# Allegro board ISL6236A_PCB_V1I1.brd
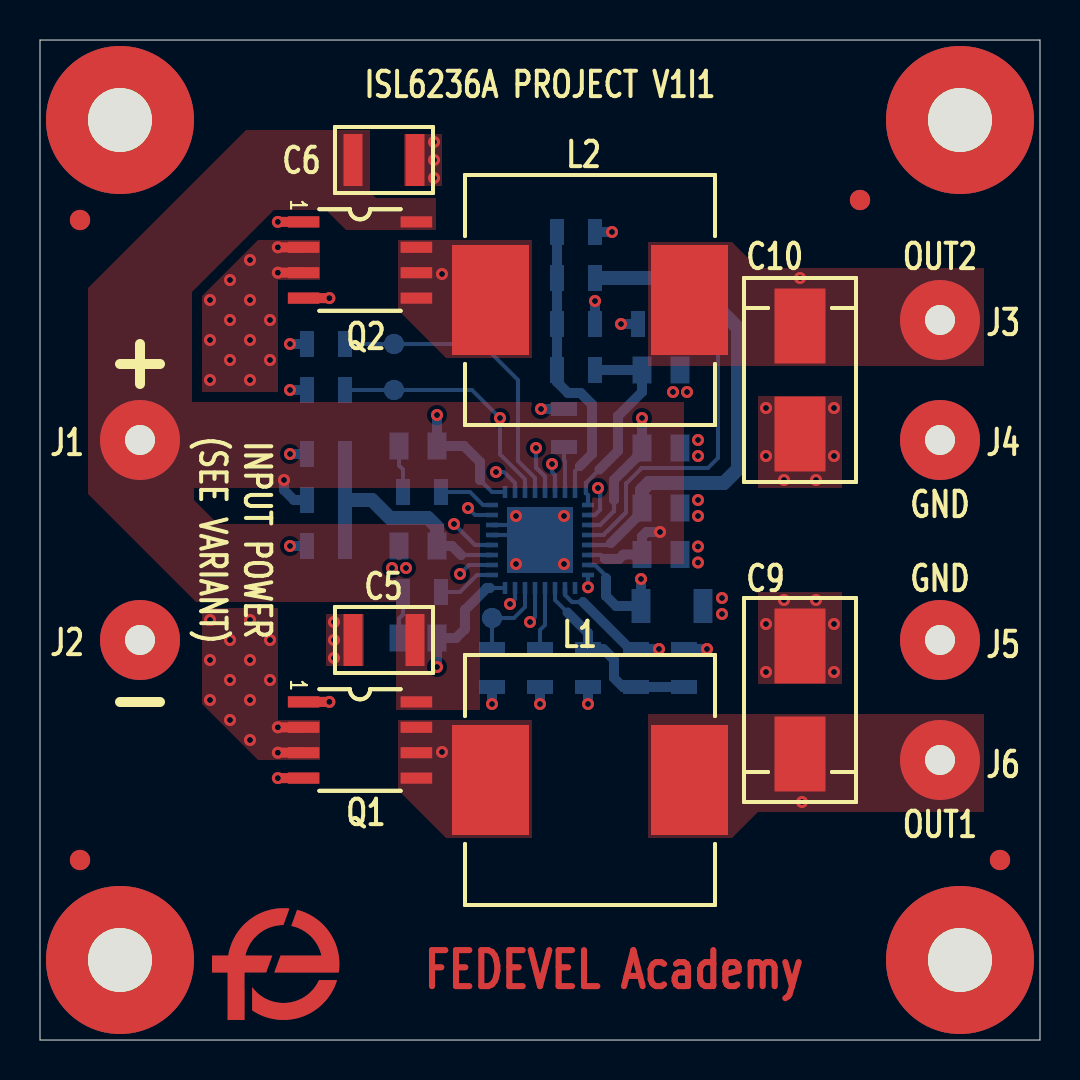
[diagram p0: board, top side]
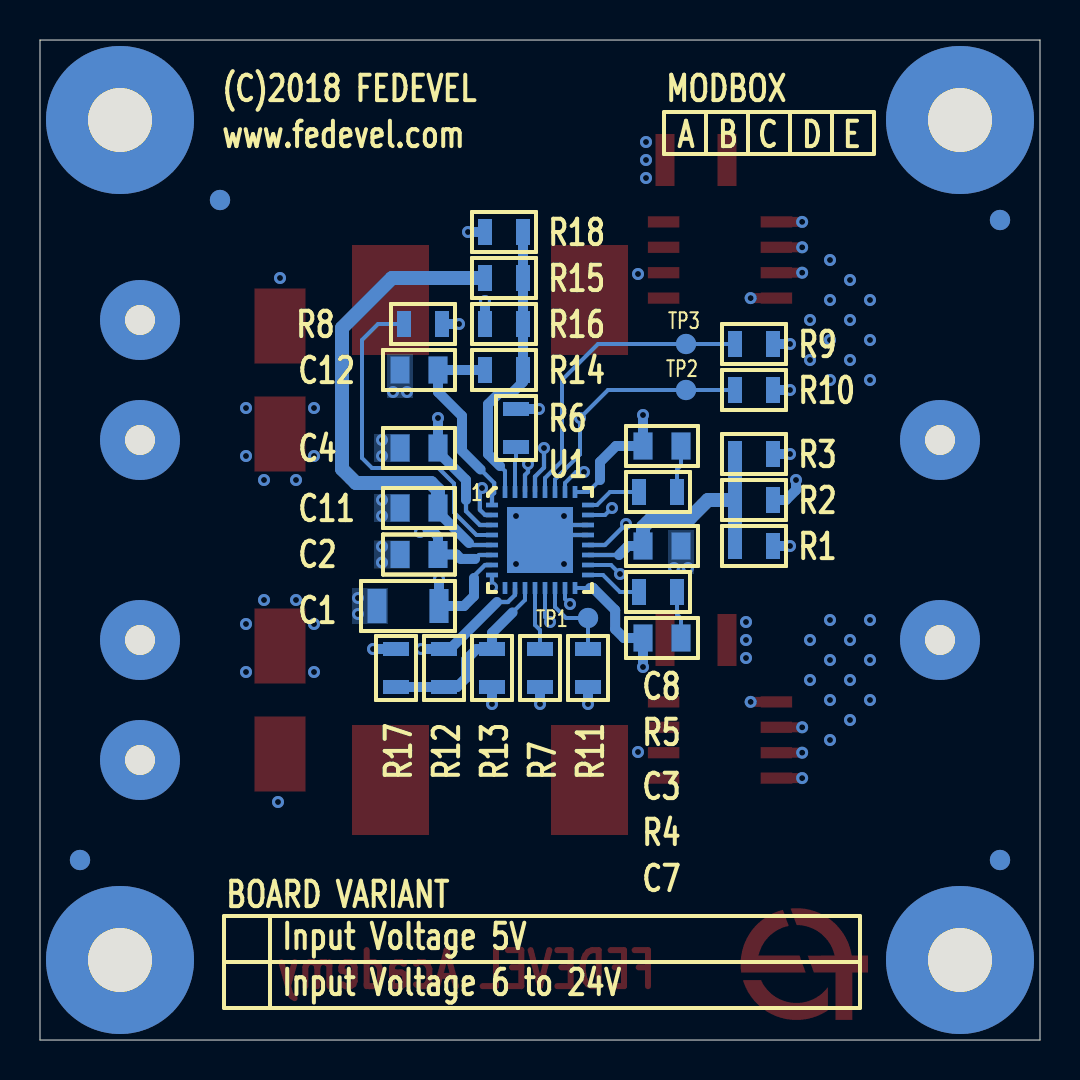
[diagram p1: board, bottom side, seen from below]

Outline 50 x 50 mm; copper layers: TOP, L2, L3, L4, L5, BOTTOM. Coordinates in mm from the lower left corner of the outline.
Outline path: 0,50 50,50 50,0 0,0 0,50

## Design rules (mm)
constraint set DEFAULT: 
net group POWER_CLASS: nets +5V_LDO +5V_PVCC +REF +VREF3

## Placement (name value [footprint] x y rotation side)
C1  4u7, 35V  [C1206]  31.6 21.7 180 bottom
C2  1uF, 50V  [C0805]  31.05 24.27 180 bottom
C3  1uF, 50V  [C0805]  18.9 24.7 180 bottom
C4  1uF, 50V  [C0805]  31.05 29.6 0 bottom
C5  10uF, 50V  [C1210]  17.2 20 0 top
C6  10uF, 50V  [C1210]  17.2 44 180 top
C7  100nF  [C0805]  18.9 20.1 180 bottom
C8  220nF  [C0805]  18.9 29.7 0 bottom
C9  330uF, 10V  [7343-43]  38 17 90 top
C10  330uF, 10V  [7343-43]  38 33 270 top
C11  10nF  [C0805]  31.05 26.6 0 bottom
C12  100nF  [C0805]  31.05 33.5 0 bottom
FID1  Fiducial M80MILxD40MIL  [FID_M80MIL_D40MIL]  2 9 0 top
FID2  Fiducial M80MILxD40MIL  [FID_M80MIL_D40MIL]  48 9 0 top
FID3  Fiducial M80MILxD40MIL  [FID_M80MIL_D40MIL]  41 42 0 top
FID4  Fiducial M80MILxD40MIL  [FID_M80MIL_D40MIL]  2 41 0 top
FID5  Fiducial M80MILxD40MIL  [FID_M80MIL_D40MIL]  2 9 180 bottom
FID6  Fiducial M80MILxD40MIL  [FID_M80MIL_D40MIL]  48 9 180 bottom
FID7  Fiducial M80MILxD40MIL  [FID_M80MIL_D40MIL]  41 42 180 bottom
FID8  Fiducial M80MILxD40MIL  [FID_M80MIL_D40MIL]  2 41 180 bottom
J1  4mm x 1.5mm  [PAD_4MMX1MM5]  5 30 0 top
J2  4mm x 1.5mm  [PAD_4MMX1MM5]  5 20 0 top
J3  4mm x 1.5mm  [PAD_4MMX1MM5]  45 36 0 top
J4  4mm x 1.5mm  [PAD_4MMX1MM5]  45 30 0 top
J5  4mm x 1.5mm  [PAD_4MMX1MM5]  45 20 0 top
J6  4mm x 1.5mm  [PAD_4MMX1MM5]  45 14 0 top
L1  3u3, DR125-3R3-R  [DR125]  27.5 13 180 top
L2  2u2, DR125-2R2-R  [DR125]  27.5 37 0 top
MH1  7.4mm, 3.2mm  [MH_D7MM4_H3MM2]  4 4 0 top
MH2  7.4mm, 3.2mm  [MH_D7MM4_H3MM2]  46 4 0 top
MH3  7.4mm, 3.2mm  [MH_D7MM4_H3MM2]  46 46 0 top
MH4  7.4mm, 3.2mm  [MH_D7MM4_H3MM2]  4 46 0 top
NOREF  -  []  5 0 90 top
NOREF#2  -  []  3.35 47.46 0 top
NOREF#3  -  []  45 0 90 top
NOREF#4  -  []  44.81 36.73 0 top
NOREF#5  -  []  0 35 0 top
NOREF#6  -  []  45 0 90 top
NOREF#7  -  []  8.6 1 0 top
NOREF#8  -  []  5 0 90 top
NOREF#9  -  []  0 30 0 top
NOREF#10  -  []  45 0 90 top
NOREF#11  -  []  0 0 0 top
NOREF#12  -  []  0 5 0 top
NOREF#13  -  []  0 0 90 top
NOREF#14  -  []  45 0 90 top
NOREF#15  -  []  0 5 0 top
Q1  SI4816BDY-T1-GE3  [SO-8]  16 15 0 top
Q2  SI4816BDY-T1-GE3  [SO-8]  16 39 0 top
R1  0R  [R0805]  14.3 24.7 180 bottom
R2  0R  [R0805]  14.3 27 0 bottom
R3  10R, 1%  [R0805]  14.3 29.3 180 bottom
R4  1R, 1%  [R0805]  19.1 22.4 0 bottom
R5  1R, 1%  [R0805]  19.1 27.4 180 bottom
R6  200k, 1%  [R0805]  26.2 30.6 90 bottom
R7  200k, 1%  [R0805]  25 18.6 90 bottom
R8  10k, 1%  [R0805]  30.85 35.8 180 bottom
R9  200k, 1%  [R0805]  14.3 34.8 180 bottom
R10  200k, 1%  [R0805]  14.3 32.5 180 bottom
R11  10k, 1%  [R0805]  22.6 18.6 270 bottom
R12  TBD  [R0805]  29.8 18.6 90 bottom
R13  0R  [R0805]  27.4 18.6 270 bottom
R14  TBD  [R0805]  26.8 33.5 0 bottom
R15  0R  [R0805]  26.8 38.1 0 bottom
R16  TBD  [R0805]  26.8 35.8 0 bottom
R17  TBD  [R0805]  32.2 18.6 270 bottom
R18  TBD  [R0805]  26.8 40.4 180 bottom
TP1  Testpoint 40mil  [TP_40MIL]  22.6 21.1 180 bottom
TP2  Testpoint 40mil  [TP_40MIL]  17.7 32.5 180 bottom
TP3  Testpoint 40mil  [TP_40MIL]  17.7 34.8 180 bottom
U1  ISL6236AIRZ  [L32_5X5B]  25 25 180 bottom

## Library data of the parts
C1 = CAP CER 4.7UF 35V X5R 1206
C2-C4 = CAP CER 1UF 50V X7R 0805
C5 C6 = CAP CER 10UF 50V X5R 1210
C7 C12 = CAP CER 0.1UF 50V X7R 0805
C8 = CAP CER 0.22UF 50V X7R 0805
C9 C10 = CAP TANT POLY 330UF 10V 2917
C11 = CAP CER 10000PF 50V X7R 0805
FID1-FID8 = Fiducial M80MILxD40MIL
J1-J6 = Pad D4MMxH1MM5
L1 = FIXED IND 3.3UH 9.26A 6.3 MOHM
L2 = FIXED IND 2.2UH 10.9A 4.5 MOHM
MH1-MH4 = Mounting hole D7MM4xH3MM2
Q1 Q2 = SI4816BDY-T1-GE3
R1 R2 R13 R15 = RES SMD 0 OHM JUMPER 1/8W 0805
R3 = RES SMD 10 OHM 1% 1/8W 0805
R4 R5 = RES SMD 1 OHM 1% 1/8W 0805
R6 R7 R9 R10 = RES SMD 200K OHM 1% 1/8W 0805
R8 R11 = RES SMD 10K OHM 1% 1/8W 0805
R12 R14 R16-R18 = RES SMD TBD 0805
TP1-TP3 = Testpoint D40MIL
U1 = ISL6236AIRZ

## Footprints (pads in the part's own frame, mm; a bottom-side part is the same pattern mirrored in y, then rotated)
7343-43
  rect 3.75x2.55 smd: 1(-2.7,0) 2(2.7,0)
C0805
  rect 0.95x1.35 smd: 1(-0.95,0) 2(0.95,0)
C1206
  rect 0.95x1.7 smd: 1(-1.55,0) 2(1.55,0)
C1210
  rect 0.95x2.6 smd: 1(-1.55,0) 2(1.55,0)
DR125
  rect 3.85x5.5 smd: 1(-4.975,0) 2(4.975,0)
FID_M80MIL_D40MIL
  round 1.016 smd: (0,0)
L32_5X5B
  rect 0.6x0.23 smd: 1(-2.4,1.75) 2(-2.4,1.25) 3(-2.4,0.75) 4(-2.4,0.25) 5(-2.4,-0.25) 6(-2.4,-0.75) 7(-2.4,-1.25) 8(-2.4,-1.75) 17(2.4,-1.75) 18(2.4,-1.25) 19(2.4,-0.75) 20(2.4,-0.25) 21(2.4,0.25) 22(2.4,0.75) 23(2.4,1.25) 24(2.4,1.75)
  rect 0.23x0.6 smd: 9(-1.75,-2.4) 10(-1.25,-2.4) 11(-0.75,-2.4) 12(-0.25,-2.4) 13(0.25,-2.4) 14(0.75,-2.4) 15(1.25,-2.4) 16(1.75,-2.4) 25(1.75,2.4) 26(1.25,2.4) 27(0.75,2.4) 28(0.25,2.4) 29(-0.25,2.4) 30(-0.75,2.4) 31(-1.25,2.4) 32(-1.75,2.4)
  rect 3.3x3.3 smd: 33(0,0)
MH_D7MM4_H3MM2
  round 7.4 hole 3.2: 1(0,0)
PAD_4MMX1MM5
  round 4 hole 1.5: 1(0,0)
R0805
  rect 0.7x1.3 smd: 1(-0.95,0) 2(0.95,0)
SO-8
  rect 1.575x0.559 smd: 1(-2.819,1.905) 2(-2.819,0.635) 3(-2.819,-0.635) 4(-2.819,-1.905) 5(2.819,-1.905) 6(2.819,-0.635) 7(2.819,0.635) 8(2.819,1.905)
TP_40MIL
  round 1.016 smd: 1(0,0)

## Nets
+1V5: C9.1 J6.1 L1.1 R12.2 U1.10
+1V05: C10.1 J3.1 L2.2 U1.30
+5V_LDO: C1.2 R1.2 U1.7
+5V_PVCC: C3.1 R1.1 R2.2 R3.1 U1.19
+5V_VCC: C4.1 R3.2 R8.2 R9.2 R10.2 R11.2 R13.2 R16.2 U1.2 U1.3 U1.20
+VIN: C2.2 C5.2 C6.2 J1.1 Q1.8 Q2.8 R2.1 U1.6
GND: C1.1 C2.1 C3.2 C4.2 C5.1 C6.1 C9.2 C10.2 C11.2 C12.2 J2.1 J4.1 J5.1 MH1.1 MH2.1 MH3.1 MH4.1 Q1.2 Q1.3 Q2.2 Q2.3 R6.2 R7.1 R17.1 R18.1 U1.8 U1.21 U1.22 U1.29 U1.33
+REF: C12.1 R14.2 U1.1
+VREF3: C11.1 R15.2 U1.5(VREF3)
EN1: R11.1 TP1.1 U1.14
EN_LDO: R8.1 U1.4
FB1: R12.1 R13.1 R17.2 U1.11
LGATE1: Q1.4(G2) U1.18
LGATE2: Q2.4(G2) U1.23
PHASE1: C7.1 L1.2 Q1.5 Q1.6 Q1.7 U1.16
PHASE2: C8.2 L2.1 Q2.5 Q2.6 Q2.7 U1.25
POK1: R10.1 TP2.1 U1.13 U1.27
POK2: R9.1 TP3.1 U1.28
REFIN2: R14.1 R15.1 R16.1 R18.2 U1.32
UGATE1: Q1.1 U1.15
UGATE2: Q2.1 U1.26
N16779316: R4.2 U1.17
N16779319: C7.2 R4.1
N16779334: R5.1 U1.24
N16779337: C8.1 R5.2
N16781981: R7.2 U1.12
N16782035: R6.1 U1.31

Pads without a net: U1 9

## Via types
v1: diameter 0.6, hole 0.3, TOP to BOTTOM, 100 vias

## Routing (per net, layer and track width the routed paths; a pad name or vN(x,y) marks a point on that pad's centre or on a via; arc(x,y) is an arc through that point)
+1V05: length 17.7
  L3 w1: v1(38,38.1) 33.4,33.5 30.3,33.5 v1(25.6,28.8)
  BOTTOM w0.21: v1(25.6,28.8) 25.6,28.4 25.75,28.25 U1.30
+1V5: length 16.8
  L3 w1: v1(38.1,11.9) 38.1,12.4 v1(30.95,19.55)
  BOTTOM w0.21: 27.15,21.9 26.6,21.9 26.25,22.25 U1.10
  BOTTOM w0.5: v1(30.95,19.55) R12.2 29.5,19.55 27.15,21.9
+5V_LDO: length 24.8
  L3 w1: v1(30.05,23.05) 28.1,25 21.31,25 21.01,24.7 v1(12.5,24.7)
  BOTTOM w0.21: U1.7 27.75,23.75 28.3,23.2 28.3,23.1
  BOTTOM w0.5: R1.2 v1(12.5,24.7) ; 28.3,23.1 28.3,22.2 28.8,21.7 C1.2 v1(30.05,23.05)
+5V_PVCC: length 13.6
  BOTTOM w0.21: U1.19 21.05,24.25
  BOTTOM w0.5: 21.05,24.25 20.6,24.7 C3.1
  BOTTOM w0.7: R2.2 R3.1 ; R2.2 R1.1 ; R2.2 16.6,27 17.5,26.1 19.4,26.1 19.85,25.65 C3.1
+5V_VCC: length 17.3
  BOTTOM w0.21: U1.2 27.75,26.25 28,26.51 28,27.5 v1(27.9,27.6) ; v1(20.7,25.8) 21.75,24.75 U1.20 ; 28.7,27 28.7,26.45 28,25.75 U1.3
  BOTTOM w0.5: R13.2 v1(27.4,16.8) ; R16.2 v1(27.75,36.95) ; R3.2 v1(12.5,29.3) ; R11.2 v1(22.6,16.8) ; R9.2 v1(12.5,34.8) ; R10.2 v1(12.5,32.5) ; v1(30.1,31.1) C4.1 30.1,29.4 28.7,28 28.7,27 ; R8.2 v1(29.05,35.8)
+VIN: length 6.6
  BOTTOM w0.21: U1.6 28.05,24.25 28.25,24.05
  BOTTOM w0.5: 28.25,24.05 28.95,24.05 29.18,24.27 C2.2 30.1,25.18 30.32,25.4 v1(31,25.4) ; R2.1 12.7,27 12.2,27.5 v1(12.2,28)
GND: length 77.3
  TOP w0.5: Q1.3 v1(11.89,14.37) ; Q2.3 v1(11.89,38.37) ; Q1.2 v1(11.89,15.63) ; Q2.2 v1(11.89,39.63)
  L2 w1.5: J4.1 45,32.55 ; J4.1 42.45,30 ; J4.1 47.55,30 ; J4.1 45,27.45 ; 5,17.45 J2.1 ; J2.1 2.45,20 ; J2.1 7.55,20 ; J2.1 5,22.55 ; 42.45,20 J5.1 ; J5.1 45,17.45 ; J5.1 47.55,20 ; J5.1 45,22.55
  L5 w1.5: 45,27.45 J4.1 ; J4.1 45,32.55 ; J4.1 47.55,30 ; J4.1 42.45,30 ; J5.1 47.55,20 ; J5.1 45,22.55 ; J5.1 42.45,20 ; J5.1 45,17.45 ; 5,17.45 J2.1 ; J2.1 7.55,20 ; J2.1 5,22.55 ; J2.1 2.45,20
  BOTTOM w0.21: v1(23.8,26.2) 23.8,26.1 23.45,25.75 U1.22 ; U1.21 24.75,25.25 U1.33 ; v1(24.8,29.6) 24.8,28.62 25.25,28.17 U1.29 ; U1.8 v1(27.4,22.64)
  BOTTOM w0.5: R7.1 v1(25,16.8) ; R6.2 v1(25.05,31.55) ; R17.1 v1(33.35,19.55) ; R18.1 v1(28.6,40.4)
  vias: v1(8.5,37) v1(8.5,35) v1(8.5,33) v1(8.5,21) v1(8.5,19) v1(8.5,17) v1(9.5,38) v1(9.5,36) v1(9.5,34) v1(9.5,20) v1(9.5,18) v1(9.5,16) v1(10.5,39) v1(10.5,37) v1(10.5,35) v1(10.5,33) v1(10.5,21) v1(10.5,19) v1(10.5,17) v1(10.5,15) v1(11.5,36) v1(11.5,34) v1(11.5,20) v1(11.5,18) v1(14.7,20.9) v1(14.7,20) v1(14.7,19.1) v1(17.6,23.6) v1(18.3,23.6) v1(19.7,44.9) v1(19.7,44) v1(19.7,43.1) v1(23.8,23.8) v1(26.2,26.2) v1(26.2,23.8) v1(31.65,32.4) v1(32.35,32.4) v1(32.9,30) v1(32.9,29.2) v1(32.9,27) v1(32.9,26.2) v1(32.9,24.68) v1(32.9,23.88) v1(34.1,22.1) v1(34.1,21.3) v1(36.3,31.6) v1(36.3,29.2) v1(36.3,20.8) v1(36.3,18.4) v1(37.2,28) v1(37.2,22) v1(38.8,28) v1(38.8,22) v1(39.7,31.6) v1(39.7,29.2) v1(39.7,20.8) v1(39.7,18.4)
+REF: length 10.3
  BOTTOM w0.21: U1.1 27.4,27.24 27.3,27.35 27.3,27.85 27.97,28.53
  BOTTOM w0.5: 27.97,28.53 28.9,29.46 28.9,31.2 30.1,32.4 C12.1 R14.2
+VREF3: length 25
  BOTTOM w0.21: 28.55,24.85 28.45,24.75 U1.5
  BOTTOM w0.5: 28.55,24.85 30.1,26.4 C11.1
  BOTTOM w0.7: R15.2 32.4,38.1 34.9,35.6 34.9,28.55 34.2,27.85 30.45,27.85 30.1,27.5 C11.1
EN1: length 4.4
  BOTTOM w0.2: R11.1 TP1.1 23.7,21.1 24.25,21.65 U1.14
EN_LDO: length 17.3
  BOTTOM w0.2: U1.4 28.17,25.25 29.3,26.38 29.3,27.82 30.08,28.6 33.4,28.6 33.9,29.1 33.9,35 33.1,35.8 R8.1
FB1: length 9.9
  BOTTOM w0.2: 26.38,21.38 25.75,22 U1.11
  BOTTOM w0.5: 26.38,21.38 27.4,20.35 R13.1 28.16,19.55 28.7,19.01 28.7,18.1 29.15,17.65 R12.1 R17.2
LGATE1: length 20.4
  TOP w0.5: Q1.4 v1(11.89,13.1)
  L3 w1: v1(21,23.3) 19.9,22.2 14.27,22.2 13.1,21.03 13.1,14.16 12.04,13.1 v1(11.89,13.1)
  BOTTOM w0.2: v1(21,23.3) 21.45,23.75 U1.18
LGATE2: length 18.5
  TOP w0.5: Q2.4 v1(14.47,37.09)
  L3 w1: v1(14.47,37.09) 14.47,29.33 16.49,27.31 20.69,27.31 v1(21.4,26.6)
  BOTTOM w0.2: U1.23 21.75,26.25 v1(21.4,26.6)
PHASE1: length 10.8
  L3 w1: v1(19.85,18.65) 19.85,15.65 20.1,15.4 v1(20.1,14.4)
  BOTTOM w0.2: U1.16 22.5,22.6
  BOTTOM w0.5: v1(19.85,18.65) C7.1 20.8,20.1 21.24,20.54 21.24,21.5 22.35,22.6 22.5,22.6
PHASE2: length 13.6
  L3 w1: v1(19.85,31.25) 19.85,37.05 20.1,37.3 v1(20.1,38.3)
  BOTTOM w0.2: U1.25 22.6,27.4 22,28
  BOTTOM w0.5: v1(19.85,31.25) C8.2 21.2,29.7 22,28.9 22,28
POK1: length 38.8
  L3 w0.2: v1(23,31.1) 24.2,29.9 24.2,27.5 24.9,26.8 31,26.8 32,25.8 32,21.8 31.1,20.9 v1(24.5,20.9)
  BOTTOM w0.2: R10.1 TP2.1 21.6,32.5 v1(23,31.1) 23,29.28 24.25,28.03 U1.27 ; v1(24.5,20.9) 24.75,21.15 U1.13
POK2: length 15.3
  BOTTOM w0.2: R9.1 TP3.1 22.1,34.8 23.9,33 23.9,28.95 24.75,28.1 U1.28
REFIN2: length 14.4
  BOTTOM w0.2: U1.32 26.75,28.45 27,28.7
  BOTTOM w0.5: R18.2 R15.1 R16.1 R14.1 25.85,32.9 26.4,32.35 27.04,32.35 27.6,31.79 27.6,29.3 27,28.7
UGATE1: length 13.3
  TOP w0.5: Q1.1 v1(14.47,16.91)
  L3 w1: v1(23.5,21.8) 21.7,20 17.56,20 v1(14.47,16.91)
  BOTTOM w0.2: U1.15 23.75,22.05 v1(23.5,21.8)
UGATE2: length 24
  TOP w0.5: Q2.1 v1(11.89,40.91)
  L3 w1: v1(22.8,28.4) 21.7,29.5 18.3,29.5 17.2,30.6 17.2,39.2 15.49,40.91 v1(11.89,40.91)
  BOTTOM w0.2: v1(22.8,28.4) 23.2,28.4 23.75,27.85 U1.26
N16779316: length 2.9
  BOTTOM w0.2: U1.17 21.85,23.25 21,22.4 R4.2
N16779319: length 2.4
  BOTTOM w0.2: C7.2 17.95,21.07 18.15,21.27 R4.1
N16779334: length 2.8
  BOTTOM w0.2: R5.1 21.5,27.4 22.15,26.75 U1.24
N16779337: length 2.4
  BOTTOM w0.2: C8.1 17.95,28.73 18.15,28.52 R5.2
N16781981: length 3.2
  BOTTOM w0.2: R7.2 25,20.5 25.25,20.75 U1.12
N16782035: length 2.3
  BOTTOM w0.2: U1.31 26.25,28.95 26.2,29 R6.1

## Copper pours and planes (outline as drawn; the poured copper is in the pictures)
+1V5 on TOP: 30.4,16.3 47.2,16.3 47.2,11.4 35.9,11.4 34.6,10.1 30.4,10.1
+1V05 on TOP: 30.4,33.7 47.2,33.7 47.2,38.6 35.9,38.6 34.6,39.9 30.4,39.9
+5V_VCC on L4: 8.5,4.1 8.5,45.9 41.5,45.9 41.5,4.1
+VIN on TOP: 19.8,40.5 19.8,42.1 16.8,42.1 16.5,42.4 16.5,45.5 10.3,45.5 2.4,37.6 2.4,27.3 7.8,21.9 17.8,21.9 17.8,16.5 22,16.5 22,25.8 8.9,25.8 7.7,27 7.7,27.6 27.6,27.6 27.6,23.8 32.2,23.8 32.2,31.9 7.6,31.9 7.6,37.4 11.7,41.5 14.3,41.5 15.3,40.5
GND on TOP: 14,40 10.9,40 8.1,37.2 8.1,32.4 11.9,32.4 11.9,38 14,38
GND on TOP: 14,14 10.9,14 8.1,16.8 8.1,21.6 11.9,21.6 11.9,16 14,16
GND on TOP: 35.9,32.2 35.9,27.6 40.1,27.6 40.1,32.2
GND on TOP: 40.1,17.8 40.1,22.4 35.9,22.4 35.9,17.8
GND on TOP: 16.2,18.7 16.2,21.3 14.3,21.3 14.3,18.7
GND on TOP: 18.2,42.7 18.2,45.3 20.1,45.3 20.1,42.7
GND on BOTTOM: 31.5,25.9 31.5,27.3 33.3,27.3 33.3,25.9
GND on BOTTOM: 31.5,23.57 31.5,24.98 33.3,24.98 33.3,23.57
GND on BOTTOM: 31.5,28.9 31.5,30.3 33.3,30.3 33.3,28.9
GND on BOTTOM: 32.65,34.3 32.65,32.1 31.35,32.1 31.35,34.3
GND on BOTTOM: 18.6,25.5 18.6,23.3 17.3,23.3 17.3,25.5
GND on BOTTOM: 32.6,20.8 32.6,22.6 34.4,22.6 34.4,20.8
GND on L2, L5: 49.8,0.2 0.2,0.2 0.2,49.8 49.8,49.8
Net_1 on TOP (solid shape): 12.39,6.35 12.17,5.75 12.08,5.75 12.01,5.74 11.94,5.73 11.87,5.72 11.75,5.7 11.62,5.67 11.5,5.63 11.38,5.58 11.27,5.52 11.16,5.46 11.05,5.39 10.95,5.31 10.64,5 10.58,4.91 10.52,4.83 10.47,4.74 10.42,4.65 10.38,4.56 10.34,4.47 10.31,4.37 10.55,4.22 11.61,4.22 11.31,3.38 10.43,3.38 10.22,3.34 10.23,1.01 10.23,1 9.38,1 9.38,3.37 8.6,3.37 8.6,4.22 9.41,4.22 9.44,4.35 9.47,4.48 9.5,4.61 9.54,4.74 9.59,4.87 9.65,4.99 9.71,5.11 9.78,5.23 9.85,5.34 10.05,5.61 10.27,5.84 10.53,6.05 10.8,6.23 11.1,6.37 11.4,6.48 11.72,6.55 12.05,6.59
Net_2 on TOP (solid shape): 14.85,2.99 14.78,2.78 14.75,2.7 14.71,2.61 14.67,2.53 14.62,2.45 14.58,2.37 14.53,2.29 14.48,2.21 14.29,1.97 14.08,1.75 13.84,1.55 13.59,1.38 13.32,1.24 13.03,1.14 12.74,1.06 12.43,1.01 12.36,1.01 12.29,1 12.22,1 12.13,1 12.06,1.01 11.99,1.01 11.93,1.01 11.86,1.02 11.76,1.03 11.65,1.05 11.55,1.07 11.44,1.1 11.34,1.13 11.24,1.16 11.14,1.2 11.05,1.24 10.83,1.34 10.77,1.38 10.61,1.49 10.61,2.65 10.68,2.56 10.96,2.28 11.07,2.19 11.19,2.12 11.31,2.06 11.43,2 11.56,1.95 11.69,1.91 11.83,1.88 11.96,1.86 12.1,1.85 12.24,1.85 12.37,1.86 12.51,1.88 12.64,1.91 12.78,1.95 12.91,1.99 13.03,2.05 13.1,2.09 13.17,2.13 13.23,2.17 13.3,2.21 13.36,2.25 13.42,2.3 13.48,2.36 13.54,2.41 13.6,2.47 13.65,2.53 13.71,2.6 13.76,2.66 13.8,2.73 13.85,2.8 13.89,2.87 13.92,2.94 13.95,3
Net_3 on TOP (solid shape): 12.95,6.48 13.09,6.44 13.22,6.39 13.35,6.33 13.48,6.27 13.61,6.19 13.73,6.12 13.85,6.03 13.96,5.94 14.01,5.9 14.06,5.86 14.12,5.81 14.17,5.76 14.22,5.71 14.26,5.65 14.31,5.6 14.35,5.55 14.47,5.39 14.58,5.21 14.68,5.03 14.77,4.84 14.84,4.65 14.89,4.45 14.93,4.25 14.96,4.04 14.96,3.97 14.97,3.89 14.97,3.81 14.97,3.73 14.97,3.65 14.96,3.57 14.95,3.5 14.94,3.37 13.94,3.37 13.33,3.37 11.71,3.37 12.02,4.22 13.05,4.22 13.58,4.22 14.07,4.22 14.06,4.28 13.98,4.51 13.88,4.73 13.75,4.94 13.59,5.13 13.42,5.29 13.22,5.44 13.01,5.55 12.78,5.65 12.59,5.7 12.57,5.71 12.58,5.75 12.61,5.82 12.71,6.11 12.86,6.51
PHASE1 on TOP: 17.9,16 24.6,16 24.6,10.1 20.3,10.1 17.9,12.5
PHASE2 on TOP: 17.9,40 24.6,40 24.6,34.1 20.3,34.1 17.9,36.5

## Text on the board
Ref Des/Silkscreen Bottom: MODBOX | Input Voltage 5V | Input Voltage 6 to 24V | BOARD VARIANT | (C)2018 FEDEVEL | www.fedevel.com | E | D | C | B | A
TOP: FEDEVEL Academy
Board Geometry/Soldermask Top: FEDEVEL Academy
Ref Des/Silkscreen Top: ISL6236A PROJECT V1I1 | OUT2 | GND | OUT1 | (SEE VARIANT) | INPUT POWER
DIMENSION: Units: mm | Scale: 1:1 | Mechanical Drawing | of ISL6236A Project V1I1
ASSEMBLY_TOP: Legend: | Purple = Fitted | Gray = Not Fitted | Assembly TOP of | ISL6236A Project V1I1
ASSEMBLY_BOTTOM: Legend: | Blue = Fitted | Gray = Not Fitted | Assembly BOTTOM of | ISL6236A Project V1I1
5V VARIANT_TOP: 5V VARIANT_TOP | Legend: | Purple = Fitted | Gray = Not Fitted | Assembly TOP of | ISL6236A Project V1I1
User.5: Legend: | Blue = Fitted | Gray = Not Fitted | 5V VARIANT_BOTTOM | Assembly BOTTOM of | ISL6236A Project V1I1
User.6: 6 TO 24V VARIANT_T | Legend: | Purple = Fitted | Gray = Not Fitted | Assembly TOP of | ISL6236A Project V1I1
User.7: Legend: | Blue = Fitted | Gray = Not Fitted | 6 TO 24V VARIANT_B | Assembly BOTTOM of | ISL6236A Project V1I1
User.8: FIGURE | FINISHED_SIZE | 0.3 | 1.5 | 3.2 | DRILL CHART: TOP to BOTTOM | ALL UNITS ARE IN MILLIMETERS | PLATED | QTY | 100 | 6 | 4
User.9: Files: | 01-TOP_OVERLAY.art - Top Overlay | 02-TOP_PASTE.art - Top Paste | 03-TOP_SOLDER.art - Top Solder | 04-L1.art - Layer 1 | 05-L2.art - Layer 2 | 06-L3.art - Layer 3 | 07-L4.art - Layer 4 | 08-L5.art - Layer 5 | 09-L6.art - Layer 6 | 10-BOTTOM_SOLDER.art - Bottom Solder | 11-BOTTOM_PASTE.art - Bottom Paste | 12-BOTTOM_OVERLAY.art - Bottom Overlay | 13-MECH_DRAWING.art - Mechanical Drawing | 14-MFG_NOTES.art - Manufacturing Notes | 15-BOARD_OUTLINE.art - Board Outline | Copyright 2018 | FEDEVEL | Contact: robert.feranec@fedevel.com | Designed by FEDEVEL | www.fedevel.com | Board info | Minimum Track: 200um | Minimum Gap: 200um | Minimum Through Hole VIA: 0.6mm (pad) / 0.3mm (drill). Drilling: L1-L6 | 1. BOARD FINISH: IMMERSION Au/ELECTROLESS Ni; 0.05-0.12 um GOLD; 3-6um NICKEL | 2. SOLDER RESIST: APPLY TO BOTH SIDES COLOUR - BLUE | 3. COMPONENT IDENT: COLOUR TO BE WHITE | 4. PANELIZE THE BOARD (9PCS PER PANEL) | 5. PLACE FIDUCIALS ON THE PANEL STRIPS AS FOLLOWS: | 6. STACKUP INFORMATION: | - FIDUCIAL DIAMETER 1-1.5MM, SOLDER MASK OPENING AT LEAST 1MM GREATER THAN FIDUCIAL | - MINIMUM 4MM DISTANCE FROM THE PANEL EDGE | - 3 FIDUCIALS SHOULD LIE ON TWO LINES THAT INTERSECT AT A RIGHT ANGLE | - PLACE ONE FIDUCIAL INTO EACH PANEL CORNER | - PLACE FOUR FIDUCIALS ON THE TOP LAYER AND FOUR ON THE BOTTOM LAYER | - REQUIRED: KEEP COPPER THICKNESS OF L1 LAYER AT LEAST 35um, OTHER LAYERS AT LEAST 18um | - FINISHED PANEL THICKNESS IS NOT CRITICAL: TO BE APPROXIMATELY 1.6mm | - OTHER PARAMETERS OF STACKUP ARE NOT CRITICAL, PCB MANUFACTURER CAN DECIDE. | - PANELIZE PCBS INTO PANEL 3 x 3 (3 COLUMNS AND 3 ROWS) | ISL6236A Project | V1I1
